# EAGLE board smp (EAGLE 6.6.0)
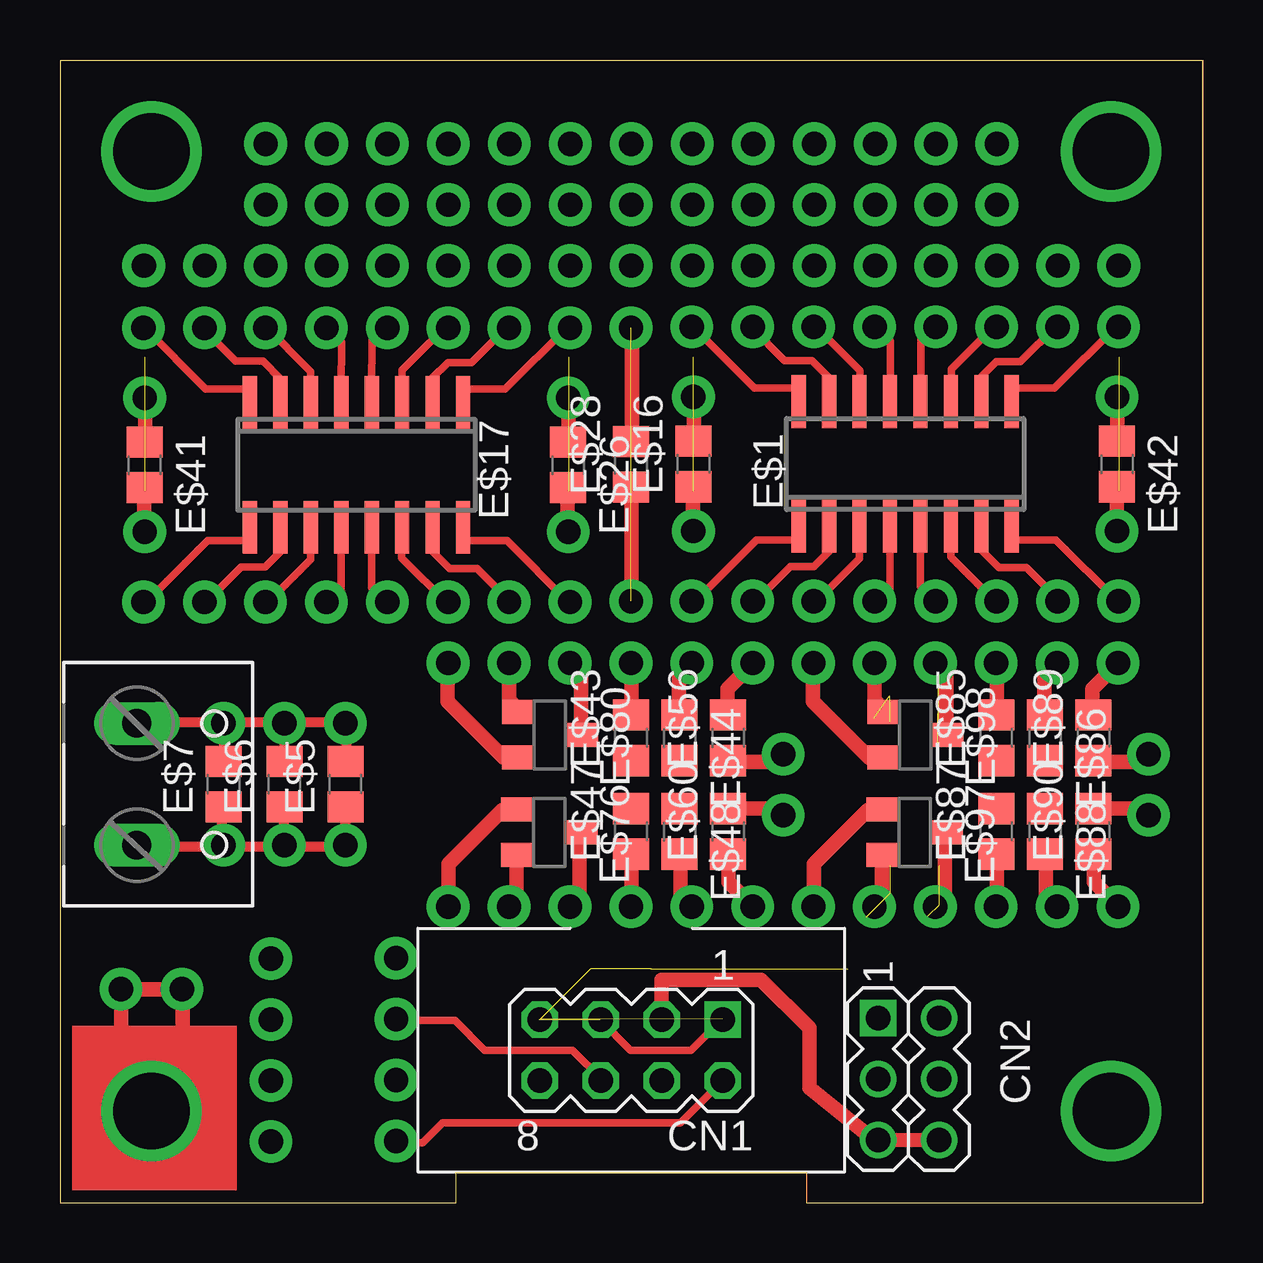
[diagram p0: board, top side]
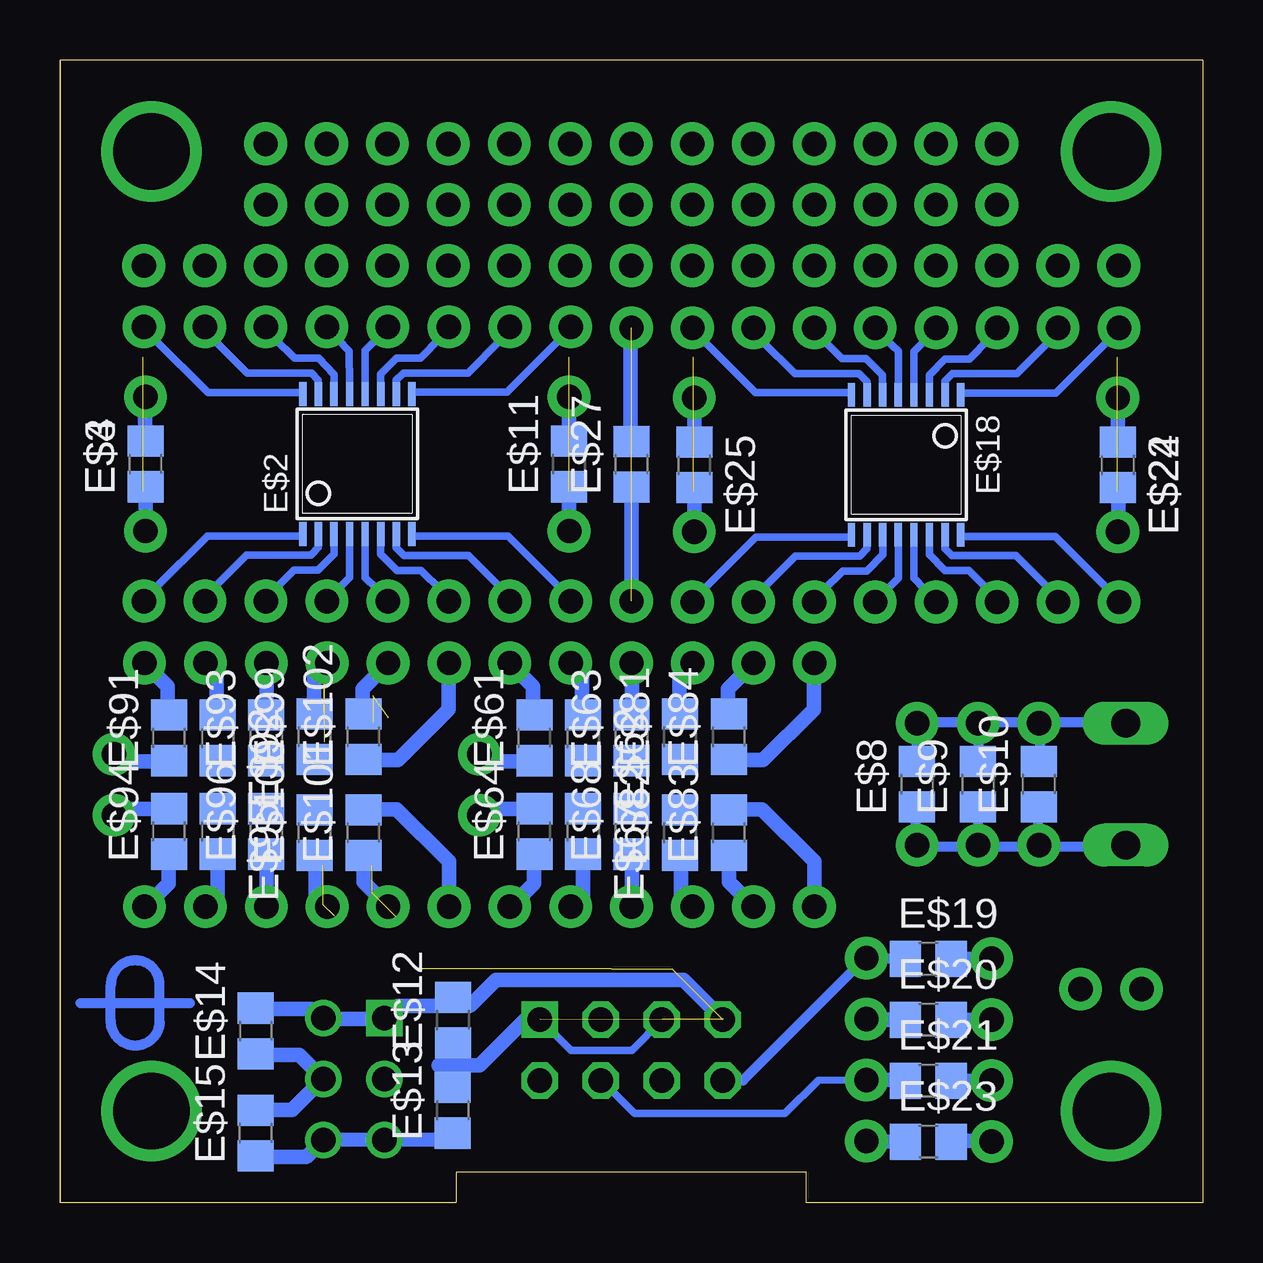
[diagram p1: board, bottom side, seen from below]

Size 47.62 x 47.62 mm. Coordinates in mm from the lower left corner, seen from the top.
Outline: 47.62,0 31.11,0 31.11,1.27 16.51,1.27 16.51,0 0,0 0,47.62 47.62,47.62
Outline: 47.62,0 47.62,47.62
Outline: 47.62,47.62 47.62,0
Copper layers (1*16): Top 0.035mm / dielectric 1.5mm / Bottom 0.035mm
Design rules "default *": minimum track width 10mil, minimum drill 24mil, track to track 12mil, track to pad 12mil, pad to pad 12mil, via to via 12mil, smd to smd 10mil, copper to edge 20mil, drill to drill 12mil, minimum pad ring 10mil, minimum via ring 8mil, stop-mask expansion 4mil, vias tented up to drill 29mil, thermal gap 10mil

## Footprints (pad centres in the part's own frame; a part is rotated, then mirrored left to right if it is on the bottom)
HDR-4X2 = drill 1.016 square: 1 -3.81,-1.27 | drill 1.016 octagon: 2 -3.81,1.27; 3 -1.27,-1.27; 4 -1.27,1.27; 5 1.27,-1.27; 6 1.27,1.27; 7 3.81,-1.27; 8 3.81,1.27
HDR-3X2 = drill 1.016 square: 1 -2.54,-1.27 | drill 1.016: 2 -2.54,1.27; 3 0,-1.27; 4 0,1.27; 5 2.54,-1.27; 6 2.54,1.27
TBLK-5.08-X2 = drill 1.194 long: 1 -2.54,-0.127; 2 2.54,-0.127
SO16 = smd 0.6 x 2.2: 1 -4.445,-2.6; 2 -3.175,-2.6; 3 -1.905,-2.6; 4 -0.635,-2.6; 5 0.635,-2.6; 6 1.905,-2.6; 7 3.175,-2.6; 8 4.445,-2.6; 9 4.445,2.6; 10 3.175,2.6; 11 1.905,2.6; 12 0.635,2.6; 13 -0.635,2.6; 14 -1.905,2.6; 15 -3.175,2.6; 16 -4.445,2.6
TSSOP16 = smd 0.305 x 0.991: 1 -2.275,-2.918; 2 -1.625,-2.918; 3 -0.975,-2.918; 4 -0.325,-2.918; 5 0.325,-2.918; 6 0.975,-2.918; 7 1.625,-2.918; 8 2.275,-2.918; 9 2.275,2.918; 10 1.625,2.918; 11 0.975,2.918; 12 0.325,2.918; 13 -0.325,2.918; 14 -0.975,2.918; 15 -1.625,2.918; 16 -2.275,2.918
C0805 = smd 1.3 x 1.5: 1 -0.95,0; 2 0.95,0
SOT23W = smd 1 x 1.4: 1 -0.95,-1.303; 2 0.95,-1.303; 3 0,1.303

## Placement (x,y rotation side)
CN1  [HDR-4X2]  23.81,6.35 180 top
CN2  HDR-3X2  [HDR-3X2]  35.37,5.14 270 top
CN3  [TBLK-5.08-X2]  3.33,17.44 270 top
E$1  [SO16]  35.23,30.78 0 top
E$2  [TSSOP16]  35.23,30.78 0 bottom
E$3  [C0805]  44.06,30.78 90 bottom
E$4  [C0805]  44.06,30.78 90 bottom
E$5  [C0805]  11.9,17.44 90 top
E$6  [C0805]  9.36,17.44 90 top
E$7  [C0805]  6.82,17.44 90 top
E$8  [C0805]  11.9,17.44 90 bottom
E$9  [C0805]  9.36,17.44 90 bottom
E$10  [C0805]  6.82,17.44 90 bottom
E$11  [C0805]  26.4,30.78 90 bottom
E$12  [C0805]  31.24,7.61 90 bottom
E$13  [C0805]  31.25,3.85 90 bottom
E$14  [C0805]  39.46,7.15 90 bottom
E$15  [C0805]  39.47,2.9 90 bottom
E$16  [C0805]  26.4,30.78 90 top
E$17  [SO16]  12.36,30.75 180 top
E$18  [TSSOP16]  12.36,30.75 180 bottom
E$19  [C0805]  11.43,10.16 0 bottom
E$20  [C0805]  11.43,7.62 0 bottom
E$21  [C0805]  11.43,5.08 0 bottom
E$22  [C0805]  3.53,30.75 270 bottom
E$23  [C0805]  11.43,2.54 0 bottom
E$24  [C0805]  3.53,30.75 270 bottom
E$25  [C0805]  21.18,30.75 270 bottom
E$26  [C0805]  21.18,30.75 270 top
E$27  [C0805]  23.8,30.77 90 bottom
E$28  [C0805]  23.8,30.77 90 top
E$41  [C0805]  3.53,30.75 270 top
E$42  [C0805]  44.06,30.78 270 top
E$43  [C0805]  23.8,19.37 90 top
E$44  [C0805]  25.83,19.37 270 top
E$47  [C0805]  23.8,15.47 90 top
E$48  [C0805]  25.83,15.47 270 top
E$56  [C0805]  27.85,19.37 90 top
E$60  [C0805]  27.85,15.47 90 top
E$61  [C0805]  27.85,19.37 90 bottom
E$62  [C0805]  25.82,19.37 270 bottom
E$63  [C0805]  23.8,19.37 90 bottom
E$64  [C0805]  27.85,15.47 90 bottom
E$67  [C0805]  25.82,15.47 270 bottom
E$68  [C0805]  23.8,15.47 90 bottom
E$76  [SOT23W]  20.4,15.43 270 top
E$80  [SOT23W]  20.42,19.49 270 top
E$81  [C0805]  21.78,19.42 90 bottom
E$82  [C0805]  21.78,15.42 90 bottom
E$83  [C0805]  19.75,15.42 90 bottom
E$84  [C0805]  19.75,19.42 90 bottom
E$85  [C0805]  39.03,19.37 90 top
E$86  [C0805]  41.06,19.37 270 top
E$87  [C0805]  39.03,15.47 90 top
E$88  [C0805]  41.06,15.47 270 top
E$89  [C0805]  43.08,19.37 90 top
E$90  [C0805]  43.08,15.47 90 top
E$91  [C0805]  43.08,19.37 90 bottom
E$92  [C0805]  41.05,19.37 270 bottom
E$93  [C0805]  39.03,19.37 90 bottom
E$94  [C0805]  43.08,15.47 90 bottom
E$95  [C0805]  41.05,15.47 270 bottom
E$96  [C0805]  39.03,15.47 90 bottom
E$97  [SOT23W]  35.62,15.43 270 top
E$98  [SOT23W]  35.65,19.49 270 top
E$99  [C0805]  37.01,19.42 90 bottom
E$100  [C0805]  37.01,15.42 90 bottom
E$101  [C0805]  34.98,15.42 90 bottom
E$102  [C0805]  34.98,19.42 90 bottom
U$1  [DPI-1]  44.49,8.32 90 bottom

## Library data of the parts
CN1 = dpi-conn; VENDOR: Digikey; VENDOR-PART-NUM: 609-3530-ND
CN2 = dpi-conn; VENDOR: Digikey; VENDOR-PART-NUM: 952-2120-ND
CN3 = dpi-conn; VENDOR: Digikey; VENDOR-PART-NUM: ED2609-ND
E$1 E$3-E$17 E$19-E$28 E$41-E$44 E$47 E$48 E$56 E$60-E$64 E$67 E$68 E$76 E$80-E$102 = smd-ipc
E$2 E$18 = ref-packages
U$1 = DP

## Nets
S$15: CN2.6

## Tracks (layer width: path | path; a pad name or v marks a point on that pad's centre or on a via)
MOUNT  (via drill 3.17 pad 3.17)
  other vias: 43.81,43.81
N$1
  Top 0.305: 39.71,33.95 41.44,33.95 44.04,36.54
N$2
  Top 0.305: 38.39,33.92 38.39,34.4 39.04,35.05 40.03,35.05 41.54,36.55
N$3
  Top 0.305: 37.15,34.2 37.15,34.73 38.99,36.56
N$4
  Top 0.305: 35.88,33.97 35.89,35.99 36.39,36.49
N$5
  Top 0.305: 30.77,33.95 28.96,33.95 26.42,36.5
N$6
  Top 0.305: 32.09,33.92 32.09,34.35 31.34,35.1 30.2,35.1 28.82,36.5
N$7
  Top 0.305: 33.34,34.2 33.34,34.67 31.43,36.59
N$8
  Top 0.305: 34.61,33.97 34.62,35.9 33.95,36.58
N$9
  Top 0.305: 30.76,27.62 29.03,27.62 26.44,25.03
N$10
  Top 0.305: 32.08,27.65 32.08,27.16 31.43,26.52 30.44,26.52 28.94,25.02
N$11
  Top 0.305: 33.33,27.37 33.33,26.84 31.5,25.01
N$12
  Top 0.305: 34.59,27.6 34.59,25.58 34.1,25.08
N$13
  Top 0.305: 39.7,27.62 41.52,27.62 44.07,25.07
N$14
  Top 0.305: 38.38,27.65 38.38,27.22 39.13,26.47 40.27,26.47 41.67,25.07
N$15
  Top 0.305: 37.13,27.37 37.13,26.9 39.05,24.98
N$16
  Top 0.305: 35.87,27.6 35.87,25.67 36.54,24.99
N$17
  Top 0.305: 7.87,27.58 6.15,27.58 3.56,24.99
N$18
  Top 0.305: 9.2,27.61 9.2,27.13 8.55,26.48 7.56,26.48 6.06,24.98
N$19
  Top 0.305: 10.44,27.33 10.44,26.8 8.61,24.97
N$20
  Top 0.305: 11.71,27.56 11.71,25.54 11.21,25.04
N$21
  Top 0.305: 16.82,27.58 18.63,27.58 21.18,25.03
N$22
  Top 0.305: 15.49,27.61 15.49,27.18 16.24,26.43 17.39,26.43 18.78,25.03
N$23
  Top 0.305: 14.25,27.33 14.25,26.86 16.17,24.94
N$24
  Top 0.305: 12.98,27.56 12.98,25.63 13.65,24.96
N$25
  Top 0.305: 16.83,33.91 18.55,33.91 21.16,36.5
N$26
  Top 0.305: 15.51,33.88 15.51,34.37 16.17,35.01 17.16,35.01 18.66,36.51
N$27
  Top 0.305: 14.26,34.16 14.26,34.7 16.1,36.52
N$28
  Top 0.305: 12.99,33.93 13.01,35.95 13.5,36.45
N$29
  Top 0.305: 7.89,33.91 6.07,33.91 3.53,36.46
N$30
  Top 0.305: 9.21,33.88 9.21,34.31 8.47,35.06 7.33,35.06 5.93,36.46
N$31
  Top 0.305: 10.45,34.16 10.45,34.63 8.55,36.55
N$32
  Top 0.305: 11.72,33.93 11.73,35.87 11.06,36.54
N$46  (via drill 3.17 pad 3.17)
  other vias: 43.81,3.81
N$47  (via drill 3.17 pad 3.17)
  other vias: 3.81,43.81
S$1
  Bottom 0.406: 3.19,20 6.83,20 | 6.83,20 11.93,20 11.93,18.34 | 6.83,20 6.78,20 6.78,18.38
S$2
  Bottom 0.406: 9.31,19.98 9.35,19.98 9.35,18.3
S$3
  Bottom 0.406: 11.96,16.54 11.96,14.83 9.35,14.83 | 9.35,14.83 6.84,14.83 | 6.84,14.83 3.07,14.83 | 9.35,14.83 9.35,16.48 | 6.84,14.83 6.84,16.52 6.86,16.52 6.86,16.48
S$4
  Top 0.406: 3.17,14.83 6.82,14.83 | 6.82,14.83 11.91,14.83 11.91,16.5 | 6.82,14.83 6.77,14.83 6.77,16.46
S$5
  Top 0.406: 9.3,14.86 9.34,14.86 9.34,16.54
S$6
  Top 0.406: 11.95,18.3 11.95,20 9.34,20 | 9.34,20 6.83,20 | 6.83,20 3.06,20 | 9.34,20 9.34,18.35 | 6.83,20 6.83,18.31 6.84,18.31 6.84,18.35
S$7
  Bottom 0.61: 27.65,7.62 28.23,7.62 30.07,5.78 30.14,5.71 31.85,5.71
S$8  (4 unrouted)
S$9
  Top 0.61: 31.24,7.26 31.24,4.78 33.95,2.59 36.74,2.62
S$10  (via drill 3.17 pad 3.17)
  other vias: 3.81,3.81
S$11
  Bottom 0.61: 31.22,2.83 31.5,2.63 36.72,2.62 36.72,2.63
S$12
  Bottom 0.61: 36.7,7.63 37.15,8.08 39.45,8.08 | 39.45,8.08 39.47,8.08 39.45,8.08
S$13
  Bottom 0.61: 36.66,5.17 37.66,6.16 39.47,6.16
S$14
  Bottom 0.61: 36.66,5.16 37.95,3.87 39.51,3.87 39.51,3.92
S$15
  Bottom 0.61: CN2.6 37.34,1.91 39.45,1.91
S$16
  Bottom 0.61: 23.84,32.23 23.84,36.36 23.81,36.39
S$17
  Top 0.305: 22.61,5.11 21.36,6.35 17.7,6.35 16.46,7.59 14.21,7.59 14.2,7.59
S$18
  Bottom 0.305: 25.08,5.11 23.69,3.71 17.4,3.71 16.02,5.09 13.99,5.11
S$19
  Top 0.305: 27.64,5.09 25.86,3.31 15.94,3.31 15.11,2.49 14.16,2.49
S$20
  Bottom 0.61: 8.76,10.13 8.78,10.15 10.52,10.15
S$21
  Bottom 0.61: 8.8,7.63 8.83,7.61 10.49,7.61 10.46,7.63 10.45,7.63
S$22
  Bottom 0.61: 12.7,10.15 12.72,10.17
S$23
  Bottom 0.61: 13.06,7.63 13.08,7.61 13.83,7.62
S$24
  Bottom 0.61: 12.7,5.08 12.72,5.11 13.92,5.12
S$25
  Bottom 0.61: 12.71,2.53 12.72,2.54 13.92,2.55
S$26
  Bottom 0.61: 8.91,2.54 8.94,2.56 10.55,2.56
S$27
  Bottom 0.61: 8.7,5.07 8.71,5.08 10.58,5.08
S$28
  Top 0.61: 3.77,4.09 2.55,5.31 2.55,8.94
S$29
  Top 0.61: 3.9,4.09 5.11,5.3 5.11,8.91
S$30
  Bottom 0.61: 23.81,29.36 23.81,25.53
S$31
  Top 0.61: 23.84,32.08 23.84,35.98
S$32
  Top 0.61: 23.81,29.27 23.81,25.7 23.75,25.64
S$33
  Bottom 0.406: 14.11,10.13 19.15,5.09 19.65,5.09
S$34
  Bottom 0.406: 12.64,10.12 12.66,10.15 13.95,10.15
S$56  (2 unrouted)
S$67  (2 unrouted)
S$68  (2 unrouted)
S$82
  Top 0.61: 44.04,27.98 44.04,29.76 44.02,29.76
S$83
  Top 0.61: 44.08,31.83 44.08,33.53 44.09,33.53
S$84
  Bottom 0.61: 44.07,31.69 44.07,33.44
S$85
  Bottom 0.61: 44.06,27.93 44.06,29.62
S$86
  Top 0.61: 26.39,27.98 26.39,29.76 26.36,29.76
S$87
  Top 0.61: 26.43,31.83 26.43,33.53 26.44,33.53
S$88
  Bottom 0.61: 26.42,31.69 26.42,33.44
S$89
  Bottom 0.61: 26.4,27.93 26.4,29.62
S$90
  Bottom 0.305: 37.49,33.77 41.45,33.77 43.67,35.98
S$91
  Bottom 0.305: 36.85,34.07 36.85,34.28 37.13,34.57 39.81,34.57 41.2,35.94
S$92
  Bottom 0.305: 36.21,34.11 36.21,34.52 36.84,35.19 37.85,35.19 38.68,36.02
S$93
  Bottom 0.305: 35.56,34.1 35.57,35.5 36.01,35.95
S$94
  Bottom 0.305: 32.92,27.77 28.96,27.77 26.75,25.57
S$95
  Bottom 0.305: 33.6,27.51 33.6,27.3 33.27,26.98 30.59,26.98 29.22,25.6
S$96
  Bottom 0.305: 34.25,27.45 34.25,27.04 33.57,26.35 32.56,26.35 31.74,25.53
S$97
  Bottom 0.305: 34.91,27.45 34.91,26.05 34.42,25.59
S$98
  Top 0.61: 23.79,29.74 23.76,29.74
S$108
  Bottom 0.61: 36.73,7.66 36.72,7.66 33.92,7.66
S$109
  Top 0.61: 25.07,7.59 25.07,9.28 28.93,9.28 29.22,9.28 31.23,7.28
S$110  (1 unrouted)
S$111
  Bottom 0.61: 19.98,7.62 21.64,9.28 29.44,9.28 30.5,8.22
S$112
  Top 0.305: 22.5,7.63 23.79,6.35 26.14,6.35 26.3,6.35 27.6,7.64
S$113
  Bottom 0.305: 22.5,7.63 23.79,6.35 26.31,6.35 27.09,7.12 27.1,7.12
S$114
  Bottom 0.61: 34.07,7.64 33.53,8.19 31.15,8.19
S$115
  Top 0.61: 21.29,22.47 21.72,22.04 21.72,19.58
S$116
  Bottom 0.305: 32.94,33.78 28.98,33.78 26.78,35.99
S$117
  Bottom 0.305: 33.6,34.07 33.6,34.28 33.3,34.58 30.62,34.58 29.26,35.95
S$118
  Bottom 0.305: 34.27,34.12 34.27,34.53 33.59,35.2 32.59,35.2 31.77,36.03
S$119
  Bottom 0.305: 34.9,34.11 34.91,35.51 34.45,35.97
S$120
  Top 0.61: 23.81,22.49 23.82,22.48 23.82,20.47
S$121
  Top 0.61: 26.35,22.54 25.79,21.98 25.79,20.47
S$122
  Top 0.61: 28.89,22.49 27.81,21.41 27.81,20.42 27.8,20.43
S$123
  Top 0.61: 30.18,18.73 29.81,18.36 27.93,18.36 27.94,18.38
S$124
  Top 0.61: 30.18,16.14 29.9,16.42 27.89,16.42
S$125
  Top 0.61: 28.87,12.36 27.86,13.36 27.86,14.4
S$126
  Top 0.61: 26.31,12.36 25.86,12.81 25.86,14.4
S$127
  Top 0.61: 23.84,12.31 23.82,12.32 23.82,14.38
S$128
  Bottom 0.61: 26.31,22.47 25.86,22.01 25.86,20.37
S$129
  Bottom 0.61: 23.79,22.49 23.77,22.48 23.77,20.47
S$130
  Bottom 0.61: 21.25,22.54 21.81,21.98 21.81,20.47
S$131
  Bottom 0.61: 18.71,22.49 19.79,21.41 19.79,20.42 19.8,20.43
S$132
  Bottom 0.61: 30.15,18.75 29.79,18.39 27.85,18.39 27.85,18.41
S$133
  Bottom 0.61: 30.06,16.1 29.76,16.41 27.96,16.41 28,16.45 28.02,16.45
S$134
  Bottom 0.61: 19.67,18.36 19.66,18.38
S$135
  Top 0.61: 18.71,18.53 18.52,18.53 16.15,20.89 16.15,21.92 16.13,21.95
S$136
  Bottom 0.61: 18.73,12.36 19.74,13.36 19.74,14.4
S$137
  Bottom 0.61: 21.29,12.36 21.74,12.81 21.74,14.4
S$138
  Bottom 0.61: 23.76,12.31 23.77,12.32 23.77,14.38
S$139
  Bottom 0.61: 26.29,12.33 25.82,12.8 25.82,14.45
S$140
  Bottom 0.61: 28.87,12.31 27.86,13.31 27.86,14.45
S$141
  Bottom 0.61: 19.66,18.36 19.65,18.38
S$142
  Top 0.61: 18.78,16.36 18.44,16.36 16.2,14.12 16.2,12.61 16.18,12.59
S$143
  Bottom 0.61: 19.14,18.45 18.31,18.45 16.2,20.56 16.2,21.79
S$144
  Bottom 0.61: 19.16,16.4 18.36,16.4 16.18,14.21 16.18,12.87
S$145
  Top 0.61: 18.67,12.33 19.04,12.7 19.04,14.36
S$146
  Top 0.61: 21.23,12.24 21.67,12.68 21.67,15.33
S$147
  Top 0.61: 36.51,22.47 36.94,22.04 36.94,19.58
S$148
  Top 0.61: 39.04,22.49 39.05,22.48 39.05,20.47
S$149
  Top 0.61: 41.58,22.54 41.02,21.98 41.02,20.47
S$150
  Top 0.61: 44.12,22.49 43.04,21.41 43.04,20.42 43.03,20.43
S$151
  Top 0.61: 45.4,18.73 45.03,18.36 43.16,18.36 43.17,18.38
S$152
  Bottom 0.305: 37.52,27.79 41.48,27.79 43.69,25.58
S$153
  Bottom 0.305: 36.85,27.5 36.85,27.29 37.16,26.99 39.84,26.99 41.21,25.62
S$154
  Bottom 0.305: 36.2,27.45 36.2,27.04 36.87,26.36 37.87,26.36 38.7,25.54
S$155
  Bottom 0.305: 35.56,27.46 35.56,26.06 36.02,25.6
S$156
  Top 0.61: 3.54,33.55 3.54,31.77 3.57,31.77
S$157
  Top 0.61: 3.5,29.7 3.5,28 3.49,28
S$158
  Bottom 0.61: 3.52,29.84 3.52,28.09
S$159
  Bottom 0.61: 3.53,33.6 3.53,31.91
S$160
  Top 0.61: 21.2,33.55 21.2,31.77 21.22,31.77
S$161
  Top 0.61: 21.16,29.7 21.16,28 21.14,28
S$162
  Bottom 0.61: 21.17,29.84 21.17,28.09
S$163
  Bottom 0.61: 21.18,33.6 21.18,31.91
S$164
  Bottom 0.305: 10.1,27.76 6.13,27.76 3.92,25.55
S$165
  Bottom 0.305: 10.73,27.46 10.73,27.25 10.45,26.96 7.77,26.96 6.4,25.59
S$166
  Bottom 0.305: 11.38,27.42 11.38,27.01 10.74,26.34 9.74,26.34 8.91,25.51
S$167
  Bottom 0.305: 12.03,27.43 12.03,26.04 11.6,25.58
S$168
  Bottom 0.305: 14.67,33.76 18.63,33.76 20.85,35.97
S$169
  Bottom 0.305: 13.98,34.02 13.98,34.23 14.31,34.56 16.99,34.56 18.38,35.93
S$170
  Bottom 0.305: 13.34,34.09 13.34,34.49 14.03,35.18 15.04,35.18 15.86,36.01
S$171
  Bottom 0.305: 12.68,34.09 12.69,35.48 13.18,35.94
S$172
  Bottom 0.305: 14.64,27.75 18.61,27.75 20.82,25.54
S$173
  Bottom 0.305: 13.98,27.46 13.98,27.25 14.29,26.95 16.97,26.95 18.34,25.58
S$174
  Bottom 0.305: 13.32,27.41 13.32,27 13.99,26.33 15,26.33 15.82,25.5
S$175
  Bottom 0.305: 12.69,27.42 12.69,26.02 13.14,25.57
S$176
  Bottom 0.305: 10.07,33.74 6.11,33.74 3.91,35.95
S$177
  Bottom 0.305: 10.73,34.04 10.73,34.24 10.43,34.54 7.75,34.54 6.39,35.92
S$178
  Bottom 0.305: 11.39,34.09 11.39,34.49 10.73,35.17 9.73,35.17 8.9,35.99
S$179
  Bottom 0.305: 12.03,34.07 12.04,35.47 11.58,35.93
S$180
  Top 0.61: 45.4,16.14 45.12,16.42 43.12,16.42
S$181
  Top 0.61: 44.09,12.36 43.09,13.36 43.09,14.4
S$182
  Top 0.61: 41.54,12.36 41.08,12.81 41.08,14.4
S$183
  Top 0.61: 39.06,12.31 39.05,12.32 39.05,14.38
S$184
  Bottom 0.61: 41.54,22.47 41.08,22.01 41.08,20.37
S$185
  Bottom 0.61: 39.01,22.49 39,22.48 39,20.47
S$186
  Bottom 0.61: 36.47,22.54 37.03,21.98 37.03,20.47
S$187
  Bottom 0.61: 33.93,22.49 35.01,21.41 35.01,20.42 35.03,20.43
S$188
  Bottom 0.61: 45.38,18.75 45.02,18.39 43.08,18.39 43.08,18.41
S$189
  Bottom 0.61: 45.29,16.1 44.98,16.41 43.19,16.41 43.23,16.45 43.24,16.45
S$190
  Bottom 0.61: 34.9,18.36 34.89,18.38
S$191
  Bottom 0.61: 33.96,12.36 34.96,13.36 34.96,14.4
S$192
  Bottom 0.61: 36.51,12.36 36.97,12.81 36.97,14.4
S$193
  Bottom 0.61: 38.99,12.31 39,12.32 39,14.38
S$194
  Bottom 0.61: 41.52,12.33 41.05,12.8 41.05,14.45
S$195
  Bottom 0.61: 44.09,12.31 43.09,13.31 43.09,14.45
S$196
  Bottom 0.61: 34.89,18.36 34.87,18.38
S$197
  Top 0.61: 33.9,12.33 34.27,12.7 34.27,14.36
S$198
  Top 0.61: 36.46,12.24 36.89,12.68 36.89,15.33
S$199
  Top 0.61: 33.93,18.53 33.74,18.53 31.38,20.89 31.38,21.92 31.36,21.95
S$200
  Top 0.61: 34.01,16.36 33.67,16.36 31.43,14.12 31.43,12.61 31.41,12.59
S$201
  Bottom 0.61: 34.37,18.45 33.54,18.45 31.43,20.56 31.43,21.79
S$202
  Bottom 0.61: 34.39,16.4 33.59,16.4 31.41,14.21 31.41,12.87
WW1  (via drill 1.02 pad 1.78)
  other vias: 26.34,25.07
WW2  (1 unrouted)
WW3  (1 unrouted)
WW4  (via drill 1.02 pad 1.78)
  other vias: 26.34,36.5
WW5  (via drill 1.02 pad 1.78)
  other vias: 28.88,25.07
WW6  (via drill 1.02 pad 1.78)
  Top 0.61: v2.54,8.89 v5.08,8.89
WW7  (1 unrouted)
WW8  (1 unrouted)
WW9  (via drill 1.02 pad 1.78)  (1 unrouted)
  other vias: 23.8,36.46 23.8,25.07
WW10  (via drill 1.02 pad 1.78)
  other vias: 3.49,39.05
WW11  (via drill 1.02 pad 1.78)
  Top 0.61: v18.72,22.49 18.72,20.94 19.06,20.6
WW12  (via drill 1.02 pad 1.78)
  other vias: 21.26,22.49
WW13  (via drill 1.02 pad 1.78)
  other vias: 28.88,36.5
WW14  (via drill 1.02 pad 1.78)
  other vias: 31.42,25.07
WW15  (via drill 1.02 pad 1.78)
  other vias: 31.42,36.5
WW16  (via drill 1.02 pad 1.78)
  other vias: 33.96,25.07
WW17  (via drill 1.02 pad 1.78)
  other vias: 33.96,36.5
WW18  (via drill 1.02 pad 1.78)
  other vias: 36.5,25.07
WW19  (via drill 1.02 pad 1.78)
  other vias: 23.8,22.49
WW20  (via drill 1.02 pad 1.78)
  other vias: 26.34,22.49
WW21  (via drill 1.02 pad 1.78)
  other vias: 28.88,22.49
WW22  (via drill 1.02 pad 1.78)
  other vias: 18.72,12.33
WW23  (via drill 1.02 pad 1.78)
  other vias: 6.03,39.05
WW24  (via drill 1.02 pad 1.78)
  other vias: 36.5,36.5
WW25  (via drill 1.02 pad 1.78)
  other vias: 39.04,25.07
WW26  (via drill 1.02 pad 1.78)
  other vias: 39.04,36.5
WW27  (via drill 1.02 pad 1.78)
  other vias: 41.58,25.07
WW28  (via drill 1.02 pad 1.78)
  other vias: 21.26,12.33
WW29  (via drill 1.02 pad 1.78)
  other vias: 23.8,12.33
WW30  (via drill 1.02 pad 1.78)
  other vias: 41.58,36.5
WW31  (via drill 1.02 pad 1.78)
  other vias: 44.12,25.07
WW32  (via drill 1.02 pad 1.78)
  other vias: 26.34,12.33
WW33  (via drill 1.02 pad 1.78)
  other vias: 28.88,12.33
WW34  (via drill 1.02 pad 1.78)
  other vias: 16.18,12.33
WW35  (via drill 1.02 pad 1.78)
  other vias: 16.18,22.49
WW36  (via drill 1.02 pad 1.78)
  other vias: 8.57,39.05
WW37  (via drill 1.02 pad 1.78)
  other vias: 8.57,41.59
WW38  (via drill 1.02 pad 1.78)
  other vias: 8.57,44.13
WW39  (via drill 1.02 pad 1.78)
  other vias: 30.15,16.14
WW40  (via drill 1.02 pad 1.78)
  other vias: 30.15,18.68
WW41  (via drill 1.02 pad 1.78)
  other vias: 44.12,36.5
WW42  (via drill 1.02 pad 1.78)
  other vias: 6.82,14.9
WW43  (via drill 1.02 pad 1.78)
  other vias: 8.79,2.54
WW44  (via drill 1.02 pad 1.78)
  other vias: 6.82,19.98
WW45
  Bottom 0.61: 28.88,22.49 27.9,21.51 27.9,20.42
WW46  (via drill 1.02 pad 1.78)
  Top 0.61: v33.95,22.49 33.95,20.94 34.29,20.6
WW49  (via drill 1.02 pad 1.78)
  other vias: 11.11,39.05
WW50  (via drill 1.02 pad 1.78)
  other vias: 11.11,41.59
WW51  (via drill 1.02 pad 1.78)
  other vias: 11.11,44.13
WW52  (via drill 1.02 pad 1.78)
  other vias: 44.06,33.58 44.06,27.99
WW53  (via drill 1.02 pad 1.78)
  other vias: 9.36,14.9
WW54  (via drill 1.02 pad 1.78)
  other vias: 26.4,33.58 26.4,27.99
WW55  (via drill 1.02 pad 1.78)
  other vias: 21.26,36.46
WW56  (via drill 1.02 pad 1.78)
  other vias: 8.79,5.08
WW57  (via drill 1.02 pad 1.78)
  other vias: 21.26,25.03
WW58  (via drill 1.02 pad 1.78)
  other vias: 18.72,36.46
WW59  (via drill 1.02 pad 1.78)
  other vias: 18.72,25.03
WW60  (via drill 1.02 pad 1.78)
  other vias: 16.18,36.46
WW61  (via drill 1.02 pad 1.78)
  other vias: 16.18,25.03
WW62  (via drill 1.02 pad 1.78)
  other vias: 13.65,39.05
WW63  (via drill 1.02 pad 1.78)
  other vias: 13.65,41.59
WW64  (via drill 1.02 pad 1.78)
  other vias: 13.65,44.13
WW65  (via drill 1.02 pad 1.78)
  other vias: 13.64,36.46
WW66  (via drill 1.02 pad 1.78)
  other vias: 9.36,19.98
WW67  (via drill 1.02 pad 1.78)
  other vias: 13.64,25.03
WW68  (via drill 1.02 pad 1.78)
  other vias: 11.1,36.46
WW69  (via drill 1.02 pad 1.78)
  other vias: 11.9,14.9
WW70  (via drill 1.02 pad 1.78)
  other vias: 11.1,25.03
WW71  (via drill 1.02 pad 1.78)
  other vias: 8.56,36.46
WW72  (via drill 1.02 pad 1.78)
  other vias: 8.56,25.03
WW73  (via drill 1.02 pad 1.78)
  other vias: 6.02,36.46
WW74  (via drill 1.02 pad 1.78)
  other vias: 6.02,25.03
WW75  (via drill 1.02 pad 1.78)
  other vias: 16.19,39.05
WW76  (via drill 1.02 pad 1.78)
  other vias: 16.19,41.59
WW77  (via drill 1.02 pad 1.78)
  other vias: 16.19,44.13
WW78  (via drill 1.02 pad 1.78)
  other vias: 3.48,36.46
WW79  (via drill 1.02 pad 1.78)
  other vias: 8.79,7.62
WW80  (via drill 1.02 pad 1.78)
  other vias: 11.9,19.98
WW81  (via drill 1.02 pad 1.78)
  other vias: 8.79,10.16
WW82  (via drill 1.02 pad 1.78)
  other vias: 14.01,2.57
WW83  (via drill 1.02 pad 1.78)
  other vias: 3.48,25.03
WW84  (via drill 1.02 pad 1.78)
  other vias: 3.53,27.95 3.53,33.54
WW85  (via drill 1.02 pad 1.78)
  other vias: 21.18,27.95 21.18,33.54
WW86  (via drill 1.02 pad 1.78)
  other vias: 36.49,22.49
WW87  (via drill 1.02 pad 1.78)
  other vias: 39.03,22.49
WW88  (via drill 1.02 pad 1.78)
  other vias: 18.73,39.05
WW89  (via drill 1.02 pad 1.78)
  other vias: 18.73,41.59
WW90  (via drill 1.02 pad 1.78)
  other vias: 18.73,44.13
WW91  (via drill 1.02 pad 1.78)
  other vias: 41.57,22.49
WW92  (via drill 1.02 pad 1.78)
  other vias: 14.01,5.11
WW93  (via drill 1.02 pad 1.78)
  other vias: 14.01,7.65 14.01,10.19
WW94  (via drill 1.02 pad 1.78)
  other vias: 21.27,39.05
WW95  (via drill 1.02 pad 1.78)
  other vias: 23.81,39.05
WW96  (via drill 1.02 pad 1.78)
  other vias: 44.11,22.49
WW97  (via drill 1.02 pad 1.78)
  other vias: 33.95,12.33
WW98  (via drill 1.02 pad 1.78)
  other vias: 36.49,12.33
WW99  (via drill 1.02 pad 1.78)
  other vias: 39.03,12.33
WW100  (via drill 1.02 pad 1.78)
  other vias: 41.57,12.33
WW101  (via drill 1.02 pad 1.78)
  other vias: 26.35,39.05
WW102  (via drill 1.02 pad 1.78)
  other vias: 21.27,41.59
WW103  (via drill 1.02 pad 1.78)
  other vias: 21.27,44.13
WW104  (via drill 1.02 pad 1.78)
  other vias: 44.11,12.33
WW105  (via drill 1.02 pad 1.78)
  other vias: 28.89,39.05
WW106  (via drill 1.02 pad 1.78)
  other vias: 31.43,39.05
WW107  (via drill 1.02 pad 1.78)
  other vias: 33.97,39.05
WW109  (via drill 1.02 pad 1.78)
  other vias: 31.41,12.33
WW110  (via drill 1.02 pad 1.78)
  other vias: 31.41,22.49
WW111  (via drill 1.02 pad 1.78)
  other vias: 45.38,16.14
WW112  (via drill 1.02 pad 1.78)
  other vias: 45.38,18.68
WW113
  Bottom 0.61: 44.11,22.49 43.13,21.51 43.13,20.42
WW114  (via drill 1.02 pad 1.78)
  other vias: 36.51,39.05
WW115  (via drill 1.02 pad 1.78)
  other vias: 23.81,41.59
WW116  (via drill 1.02 pad 1.78)
  other vias: 23.81,44.13
WW117  (via drill 1.02 pad 1.78)
  other vias: 39.05,39.05
WW118  (via drill 1.02 pad 1.78)
  other vias: 41.59,39.05
WW119  (2 unrouted)
WW120  (via drill 1.02 pad 1.78)
  other vias: 44.13,39.05
WW128  (via drill 1.02 pad 1.78)
  other vias: 26.35,41.59
WW129  (via drill 1.02 pad 1.78)
  other vias: 26.35,44.13
WW141  (via drill 1.02 pad 1.78)
  other vias: 28.89,41.59
WW142  (via drill 1.02 pad 1.78)
  other vias: 28.89,44.13
WW154  (via drill 1.02 pad 1.78)
  other vias: 31.43,41.59
WW155  (via drill 1.02 pad 1.78)
  other vias: 31.43,44.13
WW167  (via drill 1.02 pad 1.78)
  other vias: 33.97,41.59
WW168  (via drill 1.02 pad 1.78)
  other vias: 33.97,44.13
WW180  (via drill 1.02 pad 1.78)
  other vias: 36.51,41.59
WW181  (via drill 1.02 pad 1.78)
  other vias: 36.51,44.13
WW193  (via drill 1.02 pad 1.78)
  other vias: 39.05,41.59
WW194  (via drill 1.02 pad 1.78)
  other vias: 39.05,44.13
(copper drawn outside any net)
  shapes: Top area x1

## Text on the board
tTest: (C) 2018 Demand Peripherals, Inc. | 8 | 6 | 5.0 | 4 | Gnd | 2 | SMP, Rev 18B | 3.3